# Altium PCB FMS-YSYZ(033QXS-V1.3).PcbDoc
Units mm, origin at the board's own origin, x right, y up, seen from the top; angles counter-clockwise.
Board outline 109.7 x 15.2 mm, 2 copper layers (Top Layer, Bottom Layer); 33 components, 30 nets, 98 pads, 189 vias.
Unrouted connection lines stored in the file: 1.
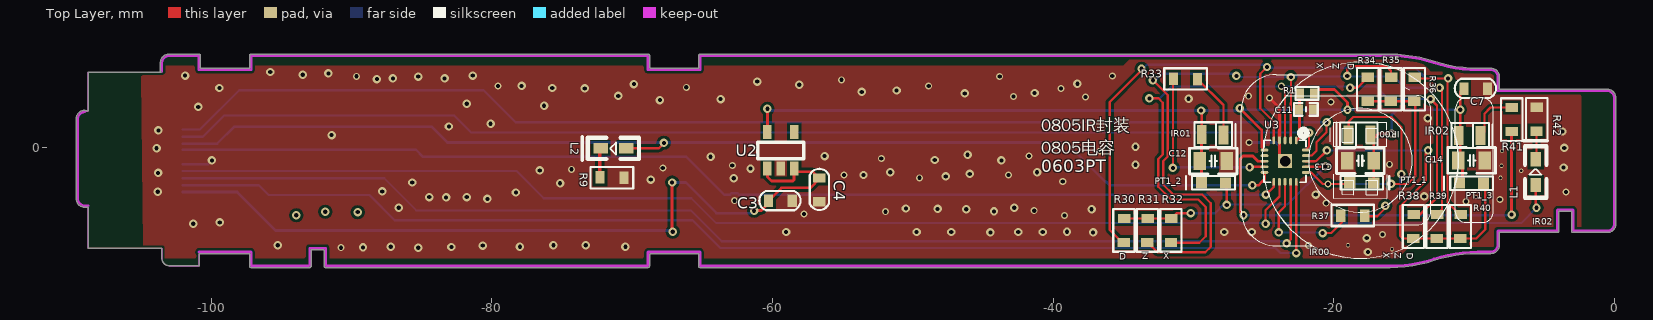
[diagram p0: Top Layer view]
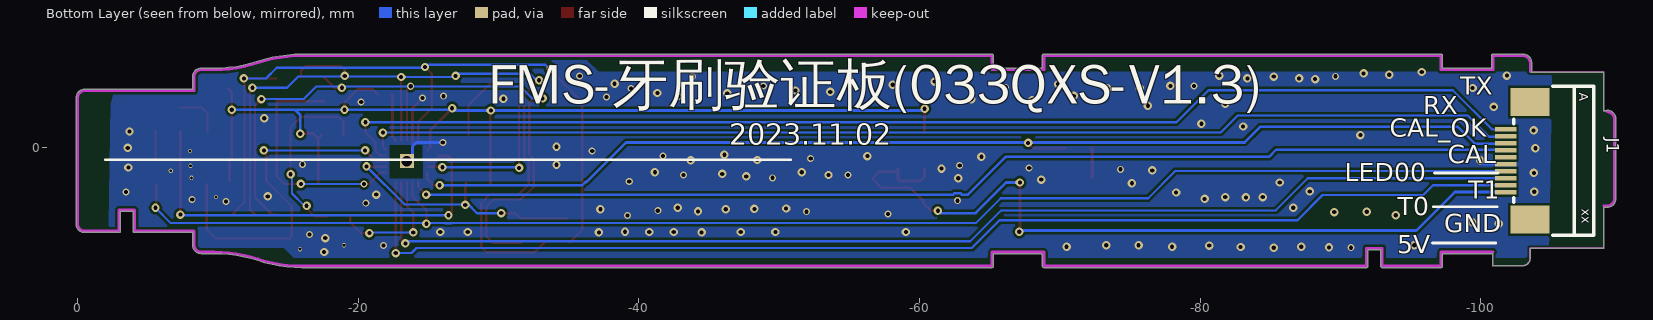
[diagram p1: Bottom Layer view, seen from below]

## Layer stack, top to bottom
Top Solder: solder mask 0.0102, Solder Resist, Dk 3.5
Top Layer: signal copper 0.0356
Dielectric 1: dielectric 0.32, FR-4, Dk 4.8
Bottom Layer: signal copper 0.0356
Bottom Solder: solder mask 0.0102, Solder Resist, Dk 3.5

## Board outline
-103.507,-7.907 ccw(c-103,-7.907) -103,-8.414 -100.85,-8.414 ccw(c-100.85,-8.407) -100.843,-8.407 -100.843,-7.55 -97.265,-7.55 -97.265,-8.45 ccw(c-97.164,-8.45) -97.164,-8.55 -92.981,-8.55 ccw(c-92.981,-8.45) -92.881,-8.45 -92.881,-7.28 -91.942,-7.28 -91.942,-8.45 ccw(c-91.841,-8.45) -91.841,-8.55 -68.864,-8.55 ccw(c-68.864,-8.45) -68.764,-8.45 -68.764,-7.55 -65.265,-7.55 -65.265,-8.45 ccw(c-65.164,-8.45) -65.164,-8.55 -16.003,-8.55 ccw(c-16.003,-8.45) -16.002,-8.55 ccw(c-16.001,-8.45) -16.001,-8.55 ccw(c-16.003,1.553) -12.848,-8.045 cw(c-9.757,-17.45) -12.848,-8.045 cw(c-9.757,-17.45) -9.757,-7.55 -8.812,-7.55 ccw(c-8.812,-6.95) -8.212,-6.95 -8.212,-6.05 -4.064,-6.05 ccw(c-4.064,-5.95) -3.964,-5.95 -3.964,-4.55 -3.065,-4.55 -3.065,-5.95 ccw(c-2.964,-5.95) -2.964,-6.05 -0.514,-6.05 ccw(c-0.514,-5.45) 0.086,-5.45 0.086,3.55 ccw(c-0.514,3.55) -0.514,4.15 ccw(c-0.514,4.05) -0.514,4.15 -8.212,4.15 -8.212,5.05 ccw(c-8.812,5.05) -8.812,5.65 ccw(c-8.812,5.05) -8.812,5.65 -9.757,5.65 cw(c-9.757,15.55) -12.848,6.145 cw(c-9.757,15.55) -12.848,6.145 ccw(c-16.003,-3.453) -16.001,6.65 ccw(c-16.001,6.55) -16.002,6.65 ccw(c-16.003,6.55) -16.003,6.65 -65.164,6.65 ccw(c-65.164,6.55) -65.265,6.55 -65.265,5.65 -68.764,5.65 -68.764,6.55 ccw(c-68.864,6.55) -68.864,6.65 -97.164,6.65 ccw(c-97.164,6.55) -97.265,6.55 -97.265,5.65 -100.764,5.65 -100.764,6.55 ccw(c-100.864,6.55) -100.864,6.65 -103.014,6.65 ccw(c-103.014,6.55) -103.015,6.65 cw(c-103.014,6.05) -103.014,6.65 -103.015,6.65 ccw(c-103.014,6.05) -103.615,6.05 -103.615,5.461 ccw(c-103.514,5.461) -103.547,5.366 -108.763,5.366 ccw(c-108.763,5.359) -108.77,5.359 -108.77,2.611 -108.934,2.611 ccw(c-109.014,2.55) -109.014,2.65 ccw(c-109.014,2.05) -109.615,2.05 -109.615,-3.65 ccw(c-109.014,-3.65) -109.015,-4.25 ccw(c-109.014,-3.65) -109.014,-4.25 cw(c-109.014,-4.15) -109.015,-4.25 -109.014,-4.25 -108.77,-4.25 -108.77,-7.163 ccw(c-108.763,-7.163) -108.763,-7.17 -103.507,-7.17

## Design rules (kind name [scope] priority, off if disabled: settings)
Clearance [All] p1: gap=0.19
ComponentClearance [All] p1: gap=0 collisioncheckmode=3 verticalgap=0 showdistances=FALSE
HoleToHoleClearance [All] p1: gap=0 allowstackedmicrovias=TRUE
MinimumSolderMaskSliver [All] p1: minsoldermaskwidth=0
PlaneConnect [All] p1: planeconnectstyle=Direct reliefexpansion=0.508 reliefentries=4 reliefconductorwidth=0.254 reliefairgap=0.254
PolygonConnect [All] p1: connectstyle=Direct reliefconductorwidth=0.254 reliefentries=4 polygonreliefangle="90 Angle" airgapwidth=0.254
RoutingVias [All] p1: holewidth=0.3 width=0.6 viastyle="Through Hole" minholewidth=0.3 minwidth=0.5 maxholewidth=1.2 maxwidth=1.2
SilkToSilkClearance [All] p1: silktosilkclearance=0
SilkToSolderMaskClearance [IsPad] p1: minsilkscreentomaskgap=0 clearancetoexposedcopper=TRUE
SolderMaskExpansion [All] p1: expansion=0.102
UnpouredPolygon [All] p1: allowunpoured=FALSE
Width [All] p1: maxlimit=0.5 minlimit=0.16 preferedwidth=0.2
23 further rules are at their usual default settings.

## Classes and differential pairs
component class FMS-LF02KEY(033QXS-V1.0): C3 C4 C7 C11 IR1_3 L2 PT1_1 PT1_3 R1 R9 U2 U3

## Components (designator, comment, footprint, x,y, rotation, side; value= is the part's Value field where it differs from the comment)
C3 "47uF/10V" C0603 -59.461,-3.81 r0 top
C4 "0.1uF 16V" C0603 -56.693,-2.997 r270 top
C7 "10uF 6.3V" C0603 -9.906,4.191 r0 top
C11 "0.1uF 16V" C0402_L -21.996,2.718 r180 top
C12 "10UF / 6V" C0805_L -28.6,-0.965 r180 top
C13 "10UF / 6V" C0805_L -18.11,-0.94 r0 top
C14 "10UF / 6V" C0805_L -10.185,-0.914 r180 top
IR00 "IR3" ir -17.399,0.889 r180 top
IR01 "IR3" ir -29.413,0.914 r0 top
IR02 "IR3" ir -11.1,0.864 r0 top
J1 "Comment" FPC-SMD_P0.5-10P_LSXJ-H2.0-10P -102.641,-0.94 r270 bottom
L1 "White" LED0603 -5.613,-1.753 r270 top (schematic designator L3)
L2 "White" LED0603 -71.333,-0.051 r0 top (schematic designator L3)
PT1_1 "FMS-PT1" "PCBComponent_1 - duplicate" -18.009,-2.515 r0 top
PT1_2 "FMS-PT1" "PCBComponent_1 - duplicate" -28.575,-2.515 r180 top
PT1_3 "FMS-PT" "PCBComponent_1 - duplicate" -10.185,-2.54 r180 top (schematic designator PT1_1)
R1 "10K" R0402_L -21.92,3.861 r180 top
R9 "200R" R0603 -71.46,-2.134 r0 top
R30 "2k" R0603 -34.95,-5.893 r270 top (schematic designator R9)
R31 "1k" R0603 -33.274,-5.893 r270 top (schematic designator R9)
R32 "510R" R0603 -31.598,-5.893 r270 top (schematic designator R9)
R33 "150R" R0603 -30.556,4.877 r180 top (schematic designator R9)
R34 "510R" R0603 -17.577,4.166 r270 top (schematic designator R9)
R35 "1k" R0603 -15.926,4.166 r270 top (schematic designator R9)
R36 "2k" R0603 -14.249,4.166 r270 top (schematic designator R9)
R37 "150R" R0603 -18.644,-4.851 r180 top (schematic designator R9)
R38 "510R" R0603 -14.326,-5.613 r270 top (schematic designator R9)
R39 "1K" R0603 -12.649,-5.613 r270 top (schematic designator R9)
R40 "2k" R0603 -10.973,-5.613 r270 top (schematic designator R9)
R41 "150R" R0603 -7.341,1.981 r90 top (schematic designator R9)
R42 "200R" R0603 -5.563,2.008 r90 top (schematic designator R9)
U2 "CSM5133" SOT-25 -60.36,-1.524 r0 top
U3 "FMS-033QXS" QFN20 -23.47,-0.965 r180 top

## Footprints (in the part's own frame and the unit in brackets; to place one, negate y for a bottom-side part, rotate by r counter-clockwise, add the part's x,y. Pads: shape width x height; smd on the part's side, far side on the other; paste and mask are expansions set on the pad)
C0402_L [mm] "贴片MLCC电容"
  rect 0.6x0.7 smd: 1(-0.508,0) 2(0.508,0)
  silkscreen extent -0.85,-0.45 0.85,0.45, body extent -0.5,-0.26 0.5,0.26, height 0.54
C0603 [mm]
  rect 0.65x0.889 smd: 1(-0.835,0.008) 2(0.865,0.008)
  silkscreen extent -1.49,-0.65 1.46,0.71
C0805_L [mil] "贴片MLCC电容"
  rect 35x50 smd: 1(-37.4,0) 2(37.4,0)
  silkscreen extent -67,-36 67,36, body extent -39,-24 39,24, height 22
FPC-SMD_P0.5-10P_LSXJ-H2.0-10P [mm]
  rect 0.3x1.5 smd: 1(-2.25,-0.865) 2(-1.75,-0.865) 3(-1.25,-0.865) 4(-0.75,-0.865) 5(-0.25,-0.865) 6(0.25,-0.865) 7(0.75,-0.865) 8(1.25,-0.865) 9(1.75,-0.865) 10(2.25,-0.865)
  rect 2x2.8 smd: 11(-4.2,0.865) 12(4.2,0.865)
  silkscreen extent -5.3,-0.3 5.3,5.42
ir [mm]
  rect 0.7x1.35 smd: A(0,0) K(1.55,-0.01)
  silkscreen extent -0.51,-0.89 2.41,0.89
LED0603 [mil]
  rect 40x30 smd: A(36,0) K(-36,0)
  silkscreen extent -88,-33 72,32
"PCBComponent_1 - duplicate" [mm]
  rect 0.8x0.8 smd: C(0.855,-0.005) E(-0.855,0.005)
  silkscreen extent -1.53,-0.49 1.95,0.49
QFN20 [mm]
  rect 1x1 hole 0.762: 0(0,0)
  oval 0.2x0.55 smd: 1(-0.789,-1.473) 2(-0.389,-1.473) 3(0.011,-1.473) 4(0.411,-1.473) 5(0.811,-1.473) 11(0.811,1.473) 12(0.411,1.473) 13(0.011,1.473) 14(-0.389,1.473) 15(-0.789,1.473)
  oval 0.55x0.2 smd: 6(1.473,-0.791) 7(1.473,-0.391) 8(1.473,0.009) 9(1.473,0.409) 10(1.473,0.809) 16(-1.473,0.809) 17(-1.473,0.409) 18(-1.473,0.009) 19(-1.473,-0.391) 20(-1.473,-0.791)
  silkscreen extent -1.55,-2.25 1.51,1.51
R0402_L [mm] "1/16W贴片电阻"
  rect 0.6x0.7 smd: 1(-0.508,0) 2(0.508,0)
  silkscreen extent -0.82,-0.45 0.83,0.45, body extent -0.5,-0.25 0.5,0.25, height 0.3
R0603 [mm]
  rect 0.65x0.889 smd: 1(-0.843,0.001) 2(0.867,-0.009)
  silkscreen extent -1.51,-0.77 1.53,0.75
SOT-25 [mm]
  rect 0.6x1 smd: 1(0,0.016) 2(0.95,0.016) 3(1.9,0.016) 4(1.9,2.616) 5(0,2.616)
  silkscreen extent -0.7,0.72 2.6,1.92

## Part data
C3 C4 C7 C11: library part CAP, "Capacitor"
L1 L2: library part LED
PT1_1 PT1_2: library part FMS-PT
R1 R9 R30 R31 R32 R33 R34 R35 R36 R37 R38 R39 R40 R41 R42: library part Res_4, "Semiconductor Resistor"
U2: library part HT7533-7

## Via types
v1: diameter 0.6, hole 0.3, Top Layer to Bottom Layer, 143 vias
v2: diameter 0.5, hole 0.3, Top Layer to Bottom Layer, 39 vias
v3: diameter 0.3, hole 0.2, Top Layer to Bottom Layer, 7 vias

## Nets (pads, with @x,y where several pads share a name; then routed paths per layer and width w, separated by ;. In a path a pad name is that pad's centre, name@x,y a point inside that pad or via, vN(x,y) a via of type N, cw(c..) or ccw(c..) an arc to the next point about the centre after c; other vN are vias at no path point)
5V: C3.1 C4.1 J1.10 U2.1 U2.3 | length 58.3
  Top Layer w0.2: v1(-67.158,-2.489) -67.158,-5.944 v1(-67.107,-5.994) ; v1(-61.316,-4.496) -60.808,-4.496 -60.297,-3.985 C3.1 -59.364,-2.87 -57.302,-2.87 -56.642,-2.21 -57.122,-1.73 -58.238,-1.73 U2.3 -58.461,-2.301 -58.547,-2.388 -60.071,-2.388 -60.357,-2.101 ; -60.357,-2.101 -60.357,-1.511 U2.1 -60.361,-2.098 -60.357,-2.101
  Bottom Layer w0.2: J1.10@-102.03,-3.175 -98.146,-3.175 -95.406,-5.914 -67.187,-5.914 v1(-67.107,-5.994) ; v1(-67.158,-2.489) -66.167,-2.489 -63.983,-4.674 ; -63.983,-4.68 -61.5,-4.68 v1(-61.316,-4.496)
CAL: J1.4 U3.11 | length 79.7
  Top Layer w0.18: v1(-24.841,-3.353) -24.281,-2.792 U3.11
  Bottom Layer w0.18: J1.4@-102.03,-0.152 -85.42,-0.152 -84.912,-0.66 -66.142,-0.66 -63.449,-3.353 -63.03,-3.353 -62.932,-3.255 -62.493,-3.255 -62.395,-3.353 v1(-24.841,-3.353)
CAL_OK: J1.3 L2.A U3.10 | length 82.9
  Top Layer w0.18: L2.A -68.097,-0.051 -67.742,0.305 v1(-67.742,0.33) ; v1(-25.806,-2.692) -25.375,-2.692 -25.11,-2.428
  Top Layer w0.2: -25.11,-2.428 -24.943,-2.261 U3.10
  Bottom Layer w0.18: J1.3@-102.03,0.279 -99.568,0.279 -98.349,1.499 -84.297,1.499 -83.167,0.361 -39.096,0.361 -36.271,-2.464 -36.235,-2.428 -35.971,-2.692 v1(-25.806,-2.692)
CLK: 
DIO: 
GND: C3.2 C4.2 C7.2 C11.1 C12.1 C13.1 C14.1 J1.6 R9.2 R42.2 U2.2 U3.0 U3.4 | length 10.5
  Top Layer w0.2: v2(-24.587,3.531) -23.881,2.824 U3.4 -23.881,-0.554 U3.0
  Bottom Layer w0.2: J1.6@-102.03,-1.19 -100.224,-1.19 v1(-99.949,-0.914) ; v2(-26.035,0.356) -24.145,0.356 -23.886,0.097 U3.0@-23.886,-0.965
  other v1: -17.577,-7.442 -85.242,-7.137 -89.179,-7.112 -82.88,-7.087 -87.198,-7.061 -78.003,-7.061 -70.485,-7.061 -80.645,-6.985 -95.25,-6.96 -75.616,-6.96 -73.304,-6.96 -17.653,-6.452 -44.475,-6.045 -37.16,-6.045 -59.03,-6.02 -49.733,-6.02 -47.269,-6.02 -42.494,-6.02 -40.742,-6.02 -27.813,-6.02 -25.857,-6.02 -39.014,-5.994 -101.27,-5.436 -99.39,-5.334 -44.221,-4.547 -46.203,-4.394 -37.262,-4.394 -48.235,-4.369 -50.495,-4.343 -86.639,-4.293 -42.774,-4.293 -80.315,-3.658 -83.261,-3.556 -84.455,-3.531 -81.788,-3.531 -13.564,-3.48 -21.285,-3.353 -78.283,-3.2 -103.81,-3.15 -87.808,-3.124 -75.133,-2.54 -85.674,-2.489 -68.682,-2.286 -62.763,-2.184 -47.65,-2.057 -53.518,-1.956 -45.949,-1.88 -103.784,-1.803 -51.613,-1.753 -41.148,-1.753 -76.581,-1.626 -61.57,-1.499 -3.632,-1.422 -34.138,-1.219 -43.688,-0.914 -48.438,-0.889 -64.414,-0.66 -56.286,-0.61 -46.101,-0.508 -103.886,-0.051 -3.581,-0.025 -34.138,0.051 -91.415,0.889 -3.708,1.143 -103.759,1.219 -83.058,1.499 -80.086,1.702 -13.31,2.083 -100.914,2.896 -76.276,2.972 -81.788,3.124 -68.021,3.378 -63.703,3.454 -30.353,3.48 -70.993,3.683 -46.304,3.861 -41.326,3.886 -53.645,3.962 -51.156,4.064 -73.381,4.216 -99.416,4.242 -75.692,4.242 -77.876,4.394 -58.09,4.47 -69.875,4.521 -38.278,4.547 -61.087,4.699 -88.189,4.877 -87.046,4.928 -83.363,4.928 -85.242,5.055 -101.854,5.131 -81.356,5.131 -93.472,5.182 -91.643,5.283 -95.783,5.385
  other v2: -90.754,-7.137 -21.819,-6.985 -16.535,-6.198 -39.192,-4.851 -57.76,-4.724 -51.943,-4.572 -41.351,-4.496 -20.549,-3.962 -10.592,-3.835 -62.713,-3.785 -8.179,-3.708 -3.454,-3.175 -39.319,-2.413 -49.53,-2.159 -54.915,-1.956 -43.18,-1.956 -74.32,-1.549 -67.818,-1.448 -62.865,-1.27 -16.027,-1.194 -52.248,-0.787 -41.732,-0.61 -36.678,-0.254 -20.218,3.251 -37.694,3.607 -42.824,3.632 -26.086,3.658 -39.446,4.216 -66.142,4.293 -79.553,4.394 -48.87,4.394 -55.093,4.826 -43.815,5.055 -89.637,5.08 -35.789,5.105
  other v3: -15.85,-7.239 -18.999,-6.96 -9.881,-3.531 -8.128,-2.159 -6.655,-1.651 -8.052,-1.295 -8.026,-0.254
INT: C11.2 R1.2 U3.1 | length 3.4
  Top Layer w0.2: U3.1 -22.454,0.735 R1.2@-22.454,3.759 ; R1.2@-22.428,3.785 R1.2@-22.454,3.759 ; R1.2@-22.403,3.759 R1.2@-22.454,3.759
IR0: R37.2 U3.13 | length 9.1
  Top Layer w0.16: v1(-23.927,-6.045) -23.927,-4.623 -23.481,-4.177 U3.13 ; v1(-20.803,-6.096) -20.193,-6.096 -19.441,-5.344 R37.2@-19.441,-4.902
  Bottom Layer w0.16: v1(-23.927,-6.045) -20.853,-6.045 v1(-20.803,-6.096)
IR1: R33.2 U3.9 | length 13.1
  Top Layer w0.16: v1(-31.471,-1.448) R33.2@-31.471,4.839 ; v1(-26.01,-1.397) -25.987,-1.374 U3.9
  Bottom Layer w0.16: v1(-31.471,-1.448) -31.42,-1.397 v1(-26.01,-1.397) -25.933,-1.397 v1@-25.832,-1.499
IR2: R41.1 U3.8 | length 31.2
  Top Layer w0.2: v1(-26.441,-4.826) -26.67,-4.597 -26.67,-0.813 -26.467,-0.61 -25.781,-0.61 -25.416,-0.974 U3.8 ; v1(-7.341,-4.775) R41.1
  Bottom Layer w0.18: v1(-26.441,-4.826) -24.943,-4.826
  Bottom Layer w0.2: -24.943,-4.826 -7.29,-4.826 v1(-7.341,-4.775)
IR7-K: IR00.K R37.1 | length 13.2
  Top Layer w0.16: IR00.K -18.949,1.854 -18.618,2.184 -15.926,2.184 -15.189,1.448 v1(-15.189,-1.905) ; R37.1@-17.801,-4.902 -16.916,-4.902 -16.332,-4.318 v1(-16.332,-4.14)
  Bottom Layer w0.16: v1(-16.332,-4.14) -16.154,-4.14 -15.292,-3.278 -15.292,-2.008 v1(-15.189,-1.905)
LED00: J1.7 L1.A L1.K R42.1 U3.12 | length 105.5
  Top Layer w0.16: v1(-24.867,-5.436) -24.867,-4.47 -23.881,-3.484 U3.12 ; L1.A -5.613,-4.242 v1(-5.563,-4.293) ; L1.K -5.564,-0.788 R42.1
  Bottom Layer w0.16: J1.7@-102.03,-1.676 -78.232,-1.676 -76.302,-3.607 -65.786,-3.607 -64.008,-5.385 -26.689,-5.385 -26.678,-5.396 -26.205,-5.396 -26.194,-5.385 -6.655,-5.385 v1(-5.563,-4.293)
LED01: 
NetIR1_2_K: IR01.K R33.1 | length 4.7
  Top Layer w0.16: R33.1 -27.863,3.025 IR01.K
NetIR1_3_K: IR02.K R41.2 | length 3.4
  Top Layer w0.16: IR02.K@-9.27,1.133 -9.27,2.414 -8.835,2.849 R41.2
NetL3_K: L2.K R9.1 | length 2.1
  Top Layer w0.254: R9.1 -72.303,-0.106 L2.K
RST: 
RX: J1.2 U3.20 | length 82.7
  Top Layer w0.16: U3.20 -21.993,-0.174 -21.768,0.051 v1(-21.768,1.067)
  Bottom Layer w0.16: J1.2@-102.03,0.762 -100.584,0.762 -99.06,2.286 -82.677,2.286 -81.458,1.067 v1(-21.768,1.067)
SIG00: PT1_1.E R34.2 R35.2 R36.2 U3.16 | length 18.5
  Top Layer w0.16: U3.16 -21.619,-1.774 -20.803,-2.591 v2(-20.422,-2.591) PT1_1.E@-18.945,-2.591 ; R34.2 R35.2 R36.2 ; v1(-15.926,-2.591) -14.732,-2.591 -14.209,-2.067 R36.2@-14.209,3.298
  Bottom Layer w0.16: v2(-20.422,-2.591) v1(-15.926,-2.591)
SIG01: PT1_2.E R30.1 R31.1 R32.1 U3.17 | length 19
  Top Layer w0.16: R30.1 R31.1 R32.1 -31.22,-4.674 v1(-30.201,-4.674) ; PT1_2.E -27.635,-2.604 v1(-27.635,-4.089) ; U3.17 -20.627,-1.374 v1(-20.599,-1.346)
  Bottom Layer w0.16: v1(-30.201,-4.674) -28.473,-4.674 -27.788,-3.988 v1@-27.661,-4.115 ; v1@-27.635,-4.064 -23.317,-4.064 v1(-20.599,-1.346)
SIG02: PT1_3.E R38.2 R39.2 R40.2 U3.18 | length 25.6
  Top Layer w0.16: U3.18 -21.269,-0.974 v1(-20.498,-0.203) ; v1(-13.284,-0.203) -13.462,-0.381 -13.462,-2.388 -15.265,-4.191 -15.265,-6.299 -15.084,-6.481 R38.2 R39.2 R40.2 -9.859,-6.481 -9.22,-5.842 PT1_3.E@-9.22,-2.596
  Bottom Layer w0.16: v1(-20.498,-0.203) v1(-13.284,-0.203)
SIGEN: R30.2 R36.1 R40.1 U3.5 | length 54.3
  Top Layer w0.16: R30.2@-35.074,-6.76 -35.966,-5.867 -35.966,3.251 -33.706,5.512 v1(-33.706,5.613) ; v1(-24.765,5.74) -25.248,5.258 -25.248,2.805 -24.282,1.84 U3.5@-24.282,0.508 ; R36.1@-14.168,4.928 v1(-11.862,4.928) -11.901,4.888 -11.901,-3.894 -11.024,-4.772 -11.023,-4.771 R40.1
  Bottom Layer w0.16: v1(-33.706,5.613) -33.604,5.613 -33.326,5.892 -24.916,5.892 v1(-24.765,5.74) -24.714,5.69 -14.199,5.69 -13.437,4.928 v1(-11.862,4.928)
SIGEN1: R31.2 R35.1 R39.1 U3.2 | length 59.1
  Top Layer w0.16: R31.2 -32.576,-7.468 -29.159,-7.468 -28.778,-7.087 -28.778,-3.962 -29.388,-3.353 -31.445,-3.353 -32.156,-2.642 -32.156,-0.965 -31.836,-0.645 -31.836,3.744 v1(-32.893,4.801) ; U3.2@-23.063,0.508 -23.074,0.519 -23.074,3.18 -23.063,3.191 v1(-23.063,5.029) ; v1(-19.05,5.105) -19.05,5.537 -18.796,5.791 -16.256,5.791 -15.925,5.46 R35.1 ; R39.1 -12.294,-4.416 -12.294,4.089 v1(-12.471,4.267)
  Bottom Layer w0.16: v1(-32.893,4.801) -32.715,4.801 -32.258,5.258 -26.975,5.258 -26.746,5.029 v1(-23.063,5.029) ; v1@-23.038,5.055 -15.723,5.055 -14.935,4.267 v1(-12.471,4.267)
  other v1: -26.949,5.105
SIGEN2: R32.2 R34.1 R38.1 U3.3 | length 51.6
  Top Layer w0.16: v1(-33.147,3.505) -32.491,3.505 -32.186,3.2 -32.186,-0.5 -32.506,-0.82 -32.506,-2.787 -31.59,-3.703 -29.667,-3.703 -29.128,-4.242 -29.128,-6.319 -29.591,-6.782 -31.585,-6.782 R32.2 ; v2(-23.749,4.369) -23.481,4.1 U3.3 ; v1(-18.847,4.267) -18.317,4.267 R34.1 ; R38.1 -13.864,-4.771 -12.649,-3.556 -12.649,2.997 v1(-13.106,3.454)
  Bottom Layer w0.16: v1(-33.147,3.505) -32.385,3.505 -31.547,4.343 -17.016,4.343 -16.127,3.454 v1(-13.106,3.454)
SIGEN3: 
TEST0: J1.9 U3.15 | length 86.4
  Top Layer w0.16: v1(-22.682,-7.518) U3.15@-22.682,-2.438
  Bottom Layer w0.16: J1.9@-102.03,-2.692 -96.596,-2.692 -95.9,-3.389 -88.721,-3.389 -86.929,-5.182 -65.71,-5.182 -63.729,-7.163 -24.155,-7.163 -23.8,-7.518 v1(-22.682,-7.518)
TEST1: J1.8 U3.14 | length 85.1
  Top Layer w0.16: v1(-23.368,-6.833) -23.081,-6.545 U3.14
  Bottom Layer w0.16: J1.8@-102.03,-2.19 -87.675,-2.19 -85.388,-4.476 -65.83,-4.476 -63.626,-6.68 -23.52,-6.68 v1(-23.368,-6.833)
TX: J1.1 U3.19 | length 86.8
  Top Layer w0.16: U3.19 -21.58,-0.574 -21.234,-0.229 -21.234,0.381 -20.523,1.092 v1(-20.523,1.803)
  Bottom Layer w0.16: J1.1@-102.03,1.295 -100.787,1.295 -97.997,4.086 -80.59,4.086 -78.308,1.803 v1(-20.523,1.803)
VCC3.3: C7.1 C12.2 C13.2 C14.2 IR00.A IR01.A IR02.A PT1_1.C PT1_2.C PT1_3.C R1.1 U2.5 U3.6 | length 76.9
  Top Layer w0.2: U2.5 v1(-60.361,2.769) ; PT1_2.C -29.43,0.898 IR01.A v1@-29.413,2.642 ; v1(-26.695,2.794) -25.146,1.245 -25.146,0.029 U3.6 ; R1.1@-21.412,3.785 -21.057,4.14 -19.968,4.14 -19.028,3.2 v1(-19.028,2.689) ; IR00.A IR00.A@-17.154,0.644 ; PT1_1.C IR00.A@-17.154,0.644 ; v1(-15.875,0.991) -16.807,0.991 IR00.A@-17.154,0.644 ; PT1_3.C@-10.831,-2.389 -10.831,-0.94 -10.998,-0.772 -10.998,3.942 C7.1
  Bottom Layer w0.2: v1(-60.361,2.769) -60.234,2.642 -26.848,2.642 v1(-26.695,2.794) ; v1@-26.594,2.689 v1(-19.028,2.689) -19.025,2.692 -15.494,2.692 ; v1(-15.875,0.991) -15.875,2.311 -15.494,2.692 ; v1(-10.998,2.692) -15.494,2.692
  other v1: -29.464,2.642
VEXT: 
pads on no net: J1.5 J1.11 J1.12 U2.4 U3.7
copper on no net:
  other v1: -93.929,-4.826 -89.56,-4.597 -91.872,-4.572

## Polygon pours and split planes (outlines as drawn)
GND on Top Layer "Bottom Layer-No Net" (solid, remove dead copper, pour order 4): -104.971,5.817 -36.093,5.817 -35.027,5.817 -34.519,6.325 -34.468,6.375 -15.088,6.375 -14.046,6.375 -13.31,5.639 -13.081,5.41 -3.277,5.41 -2.362,4.496 -2.362,-5.958 -3.465,-7.061 -14.63,-7.061 -15.443,-7.874 -104.841,-7.874
GND on Bottom Layer "Bottom Layer-No Net" (solid, remove dead copper, pour order 2): -105.07,5.385 -62.205,5.385 -37.135,5.385 -36.373,6.147 -36.297,6.223 -15.011,6.223 -13.97,6.223 -13.437,5.69 -13.259,5.512 -11.532,5.512 -3.81,5.512 -2.71,4.411 -2.387,3.133 -2.193,-6.706 -5.105,-6.706 -5.537,-7.137 -12.725,-7.137 -14.707,-7.137 -15.418,-7.849 -104.832,-7.849

## Keep-outs
Keep-Out Layer:
  lines w0.013: -109.014,2.604 -108.763,2.604 -108.763,5.359 -106.121,5.359 -103.5,5.359 -103.5,6.093 cw(c-103,6.093) -103,6.593 -100.85,6.593 -100.85,5.593 -97.15,5.593 ; -108.763,-4.15 -108.763,-7.163 -106.121,-7.163 -103.5,-7.163 -103.5,-7.907 ccw(c-103,-7.907) -103,-8.407 -100.85,-8.407 -100.85,-7.407 -97.15,-7.407 ; -4.05,-4.407 -2.95,-4.407 -2.95,-5.907 -0.5,-5.907 ccw(c-0.5,-5.407) 0,-5.407 0,3.593 ccw(c-0.5,3.593) -0.5,4.093 -2.95,4.093
  lines w0.15: -4.061,-4.429 -2.961,-4.429 -2.961,-5.929 -0.511,-5.929
  lines w0.2: -109.014,2.55 ccw(c-109.014,2.05) -109.514,2.05 -109.514,-3.65 ccw(c-109.014,-3.65) -109.014,-4.15 -108.763,-4.15 ; -103.514,5.461 -103.514,6.05 cw(c-103.014,6.05) -103.014,6.55 -100.864,6.55 -100.864,5.55 -97.164,5.55 -97.164,6.55 -68.864,6.55 -68.864,5.55 -65.164,5.55 -65.164,6.55 -16.003,6.55 ; -100.864,-7.45 -97.164,-7.45 -97.164,-8.45 -92.981,-8.45 -92.981,-7.18 -91.841,-7.18 -91.841,-8.45 -68.864,-8.45 -68.864,-7.45 -65.164,-7.45 -65.164,-8.45 -16.003,-8.45 ; -16.001,-8.45 ccw(c-16.003,1.553) -12.88,-7.95 cw(c-9.757,-17.45) -9.757,-7.45 -8.812,-7.45 ccw(c-8.812,-6.95) -8.312,-6.95 -8.312,-5.95 -4.064,-5.95 -4.064,-4.45 -2.964,-4.45 -2.964,-5.95 -0.514,-5.95 ccw(c-0.514,-5.45) -0.014,-5.45 -0.014,3.55 ccw(c-0.514,3.55) -0.514,4.05 -8.312,4.05 -8.312,5.05 ccw(c-8.812,5.05) -8.812,5.55 -9.757,5.55 cw(c-9.757,15.55) -12.88,6.05 ccw(c-16.003,-3.453) -16.001,6.55

## Other copper
Top Layer:
  pour cut-out: -24.562,0.178 -24.536,0.152 -22.225,0.152 -22.225,-2.184 -24.587,-2.184
  pour cut-out: -18.004,-0.762 -18.436,-0.762 -18.461,-0.737 -18.461,-1.168 -17.934,-1.168 -17.876,-1.11
  pour cut-out: -30.108,-0.894 -30.082,-0.869 -29.549,-0.869 -29.549,-0.539 -29.574,-0.513 -30.108,-0.513
  pour cut-out: -28.981,1.626 -28.956,1.6 -28.245,1.6 -28.245,0.229 -29.007,0.229
  pour cut-out: -28.931,-1.651 -28.905,-1.676 -28.194,-1.676 -28.194,-3.048 -28.956,-3.048
  pour cut-out: -18.415,-1.727 -18.39,-1.753 -17.678,-1.753 -17.678,-3.124 -18.44,-3.124
  pour cut-out: -18.491,1.6 -18.466,1.575 -17.755,1.575 -17.755,0.203 -18.517,0.203
  pour cut-out: -10.668,1.524 -10.643,1.499 -9.931,1.499 -9.931,0.127 -10.693,0.127
  pour cut-out: -10.579,-1.587 -10.554,-1.613 -9.842,-1.613 -9.842,-2.984 -10.604,-2.984
  pour cut-out: -28.956,-0.279 -28.931,-0.305 -28.219,-0.305 -28.219,-1.676 -28.981,-1.676
  pour cut-out: -18.466,-0.229 -18.44,-0.254 -17.729,-0.254 -17.729,-1.626 -18.491,-1.626
  pour cut-out: -10.516,-0.076 -10.49,-0.102 -9.779,-0.102 -9.779,-1.473 -10.541,-1.473
Bottom Layer:
  pour cut-out: -24.562,0.178 -24.536,0.152 -22.25,0.152 -22.25,-2.159 -22.225,-2.184 -24.613,-2.184

## Silkscreen, mask and mechanical layers (free items; w line width, h text height)
Top Overlay:
  circle w0.013: c-18.118,-0.904 r6.985
  circle w0.013: c-18.109,-0.908 r3.696
  lines w0.013: -24.335,2.281 cw(c-18.091,-0.914) -24.228,2.483 cw(c-18.095,-0.912) -24.074,2.747 cw(c-18.113,-0.9) -23.646,3.369 cw(c-18.096,-0.913) -23.38,3.693 -14.098,3.693 cw(c-14.098,2.693) -13.098,2.693 -13.098,-4.507 cw(c-14.098,-4.507) -14.098,-5.507 -23.38,-5.507 cw(c-18.095,-0.901) -23.566,-5.285 cw(c-18.112,-0.913) -24.074,-4.561 ; -20.254,0.409 -20.252,1.409 ; -20.249,5.756 ccw(c-18.102,-0.911) -20.619,5.625 ccw(c-18.106,-0.901) -21.537,5.193 -24.098,5.193 ccw(c-24.098,2.693) -26.598,2.693 -26.598,-4.507 ccw(c-24.098,-4.507) -24.098,-7.007 -21.537,-7.007 ccw(c-18.102,-0.905) -19.682,-7.727 ccw(c-18.106,-0.922) -19.149,-7.829 ; -20.027,0.083 -16.232,0.076 ; -20.012,-3.624 -16.217,-3.63 ; -20.012,0.09 -20.009,1.814 ; -20.01,1.812 -16.226,1.805 ; -19.997,-3.617 -19.994,-1.893 ; -16.732,5.957 cw(c-18.102,-0.902) -16.397,5.882 cw(c-18.1,-0.897) -15.113,5.422 ; -16.231,0.102 -16.228,1.752 ; -16.215,-3.605 -16.212,-1.955 ; -15.021,4.304 cw(c-18.015,-2.029) -14.724,4.155 cw(c-18.017,-2.033) -14.578,4.075 ; -11.346,-4.562 ccw(c-10.565,-4.562) -11.292,-4.846 ; -11.346,-4.561 -11.346,-2.734 ccw(c-18.102,-0.907) -11.103,-0.907 ccw(c-18.097,-0.906) -11.346,0.919 -11.346,2.747 cw(c-10.563,2.747) -11.328,2.912 cw(c-10.569,2.748) -11.195,3.208 cw(c-10.578,2.754) -11.161,3.251 cw(c-10.582,2.758) -11.086,3.327 cw(c-10.589,2.766) -10.947,3.425 cw(c-10.592,2.772) -10.909,3.444 ; -11.291,-4.847 ccw(c-10.576,-4.568) -11.172,-5.053 ccw(c-10.579,-4.57) -11.158,-5.069 ccw(c-10.582,-4.573) -11.082,-5.146 ccw(c-10.59,-4.582) -10.884,-5.27 ccw(c-10.594,-4.589) -10.844,-5.285 ; -10.908,3.444 cw(c-10.596,2.782) -10.596,3.514 -9.396,3.515 cw(c-9.396,2.782) -9.188,3.484 ; -10.844,-5.286 ccw(c-10.596,-4.597) -10.596,-5.329 -9.396,-5.329 ccw(c-9.396,-4.597) -9.234,-5.311 ccw(c-9.399,-4.585) -8.89,-5.127 ccw(c-9.41,-4.572) -8.844,-5.081 ccw(c-9.414,-4.569) -8.766,-4.978 ccw(c-9.419,-4.565) -8.715,-4.882 ccw(c-9.426,-4.562) -8.646,-4.562 ; -9.188,3.484 cw(c-9.397,2.776) -9.042,3.423 ; -9.041,3.423 cw(c-9.404,2.764) -8.894,3.317 cw(c-9.409,2.759) -8.863,3.287 cw(c-9.415,2.753) -8.758,3.15 cw(c-9.42,2.75) -8.736,3.112 cw(c-9.427,2.747) -8.646,2.747 -8.646,-4.561 ; -19.422,0.362 -18.605,0.361 -18.603,1.372 -19.42,1.373 -19.422,0.362 ; -19.406,-3.345 -18.589,-3.346 -18.587,-2.335 -19.404,-2.334 -19.406,-3.345 ; -17.71,0.353 -16.895,0.351 -16.893,1.37 -17.708,1.371 -17.71,0.353 ; -17.694,-3.354 -16.879,-3.356 -16.877,-2.337 -17.693,-2.335 -17.694,-3.354
  text "X" at -21.412,6.054 h0.8 r270
  text "D" at -19.177,6.009 h0.8 r270
  text "Z" at -20.244,5.991 h0.8 r270
  text "0805IR封装" at -40.869,0.838 h1.52
  text "0805电容" at -40.869,-0.762 h1.52
  text "0603PT" at -40.869,-2.083 h1.52
  text "IR02" at -5.867,-5.69 h0.8
  text "X" at -16.662,-7.468 h0.8 r270
  text "Z" at -15.824,-7.493 h0.8 r270
  text "D" at -14.986,-7.493 h0.8 r270
  text "IR00" at -21.768,-7.849 h0.8
  text "Z" at -33.655,-8.128 h0.8
  text "X" at -32.156,-8.128 h0.8
  text "D" at -35.281,-8.179 h0.8
Bottom Overlay:
  lines w0.16: -50.825,-0.864 -1.956,-0.864
  lines w0.2: -101.219,-1.803 -96.698,-1.803 ; -101.143,-4.216 -96.622,-4.216 ; -101.067,-6.807 -96.545,-6.807
  text "TX" at -98.527,3.759 h1.3
  text "RX" at -95.885,2.362 h1.3
  text "FMS-牙刷验证板(033QXS-V1.3)" at -29.261,2.159 h5
  text "CAL_OK" at -93.523,0.762 h1.3
  text "2023.11.02" at -46.431,-0.305 h2.54
  text "CAL" at -97.638,-1.118 h1.3
  text "LED00" at -90.297,-2.413 h1.3
  text "T1" at -99.111,-3.658 h1.3
  text "T0" at -94.082,-4.826 h1.3
  text "GND" at -97.409,-6.045 h1.3
  text "5V" at -94.031,-7.544 h1.3
Mechanical 14:
  lines w0.013: -24.818,1.071 cw(c-18.108,-0.905) -24.335,2.281

## Text inside footprints (layer, text, board x,y; h text height)
J1: Bottom Overlay "xx" at -107.177,-4.378 h0.65 r90; Bottom Overlay "A" at -107.016,3.92 h0.65 r90